# Altium PCB PCB3.PcbDoc
Units mm, origin at the board's own origin, x right, y up, seen from the top; angles counter-clockwise.
Board outline 99.9 x 60 mm, 2 copper layers (Top Layer, Bottom Layer); 34 components, 27 nets, 193 pads, 27 vias.
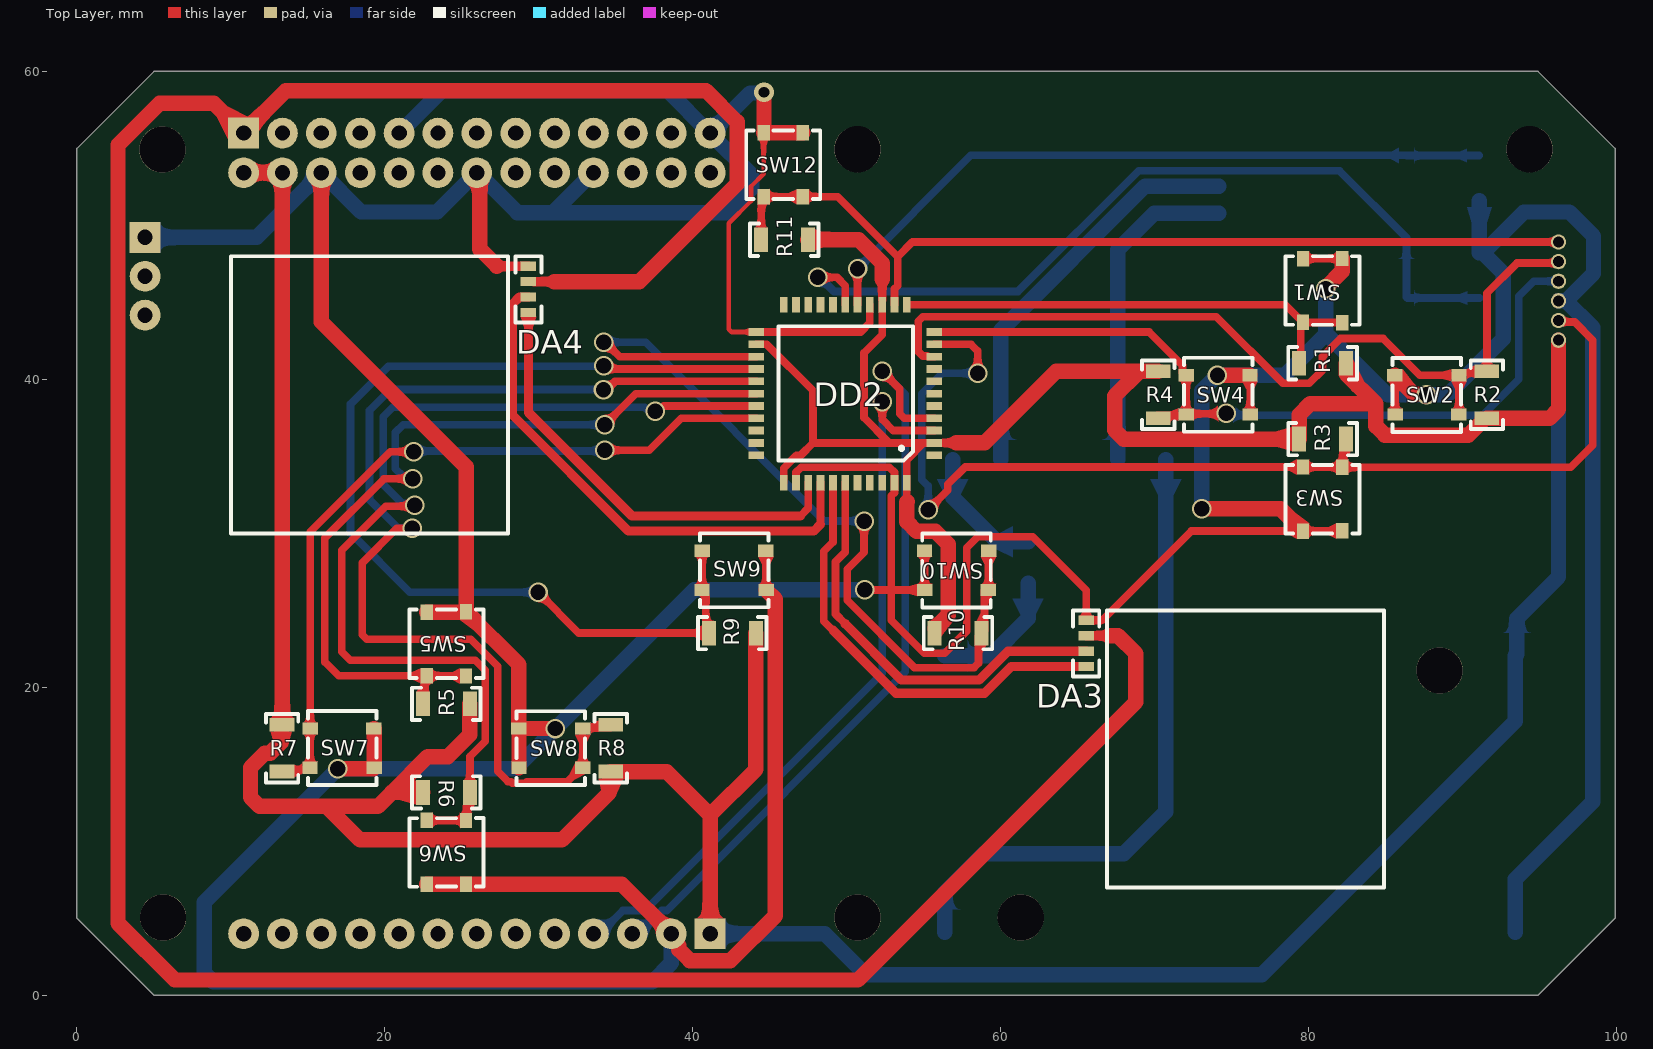
[diagram p0: Top Layer view]
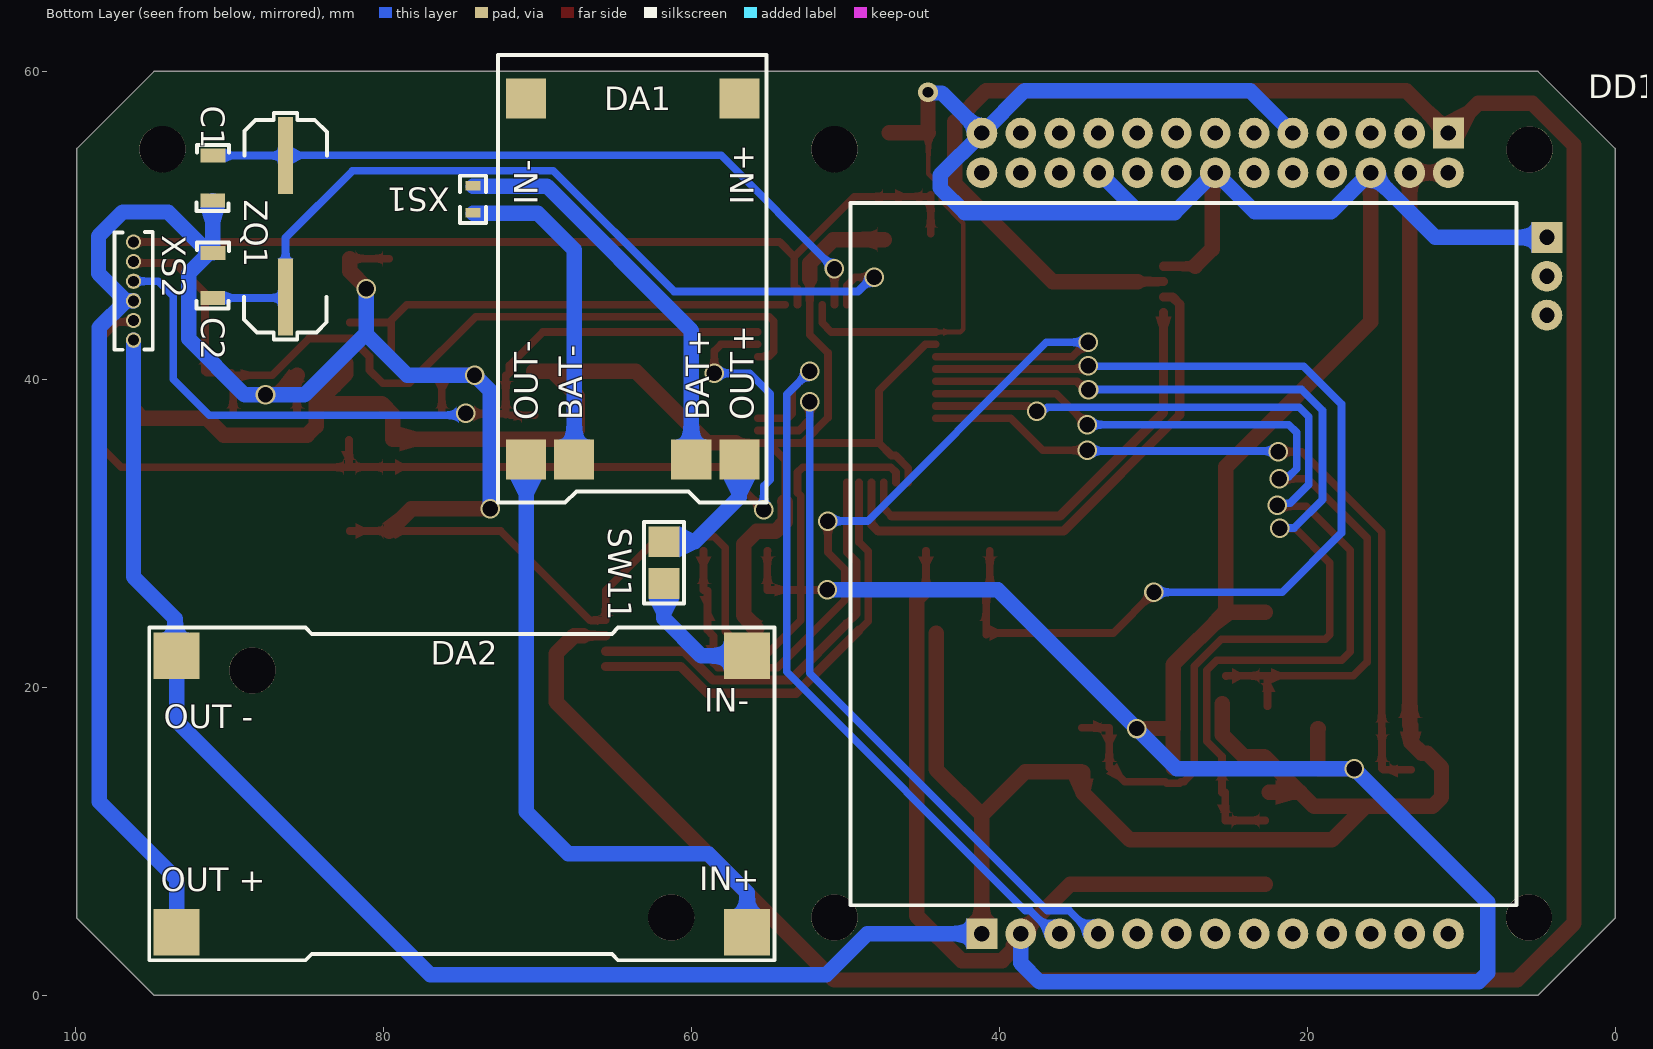
[diagram p1: Bottom Layer view, seen from below]
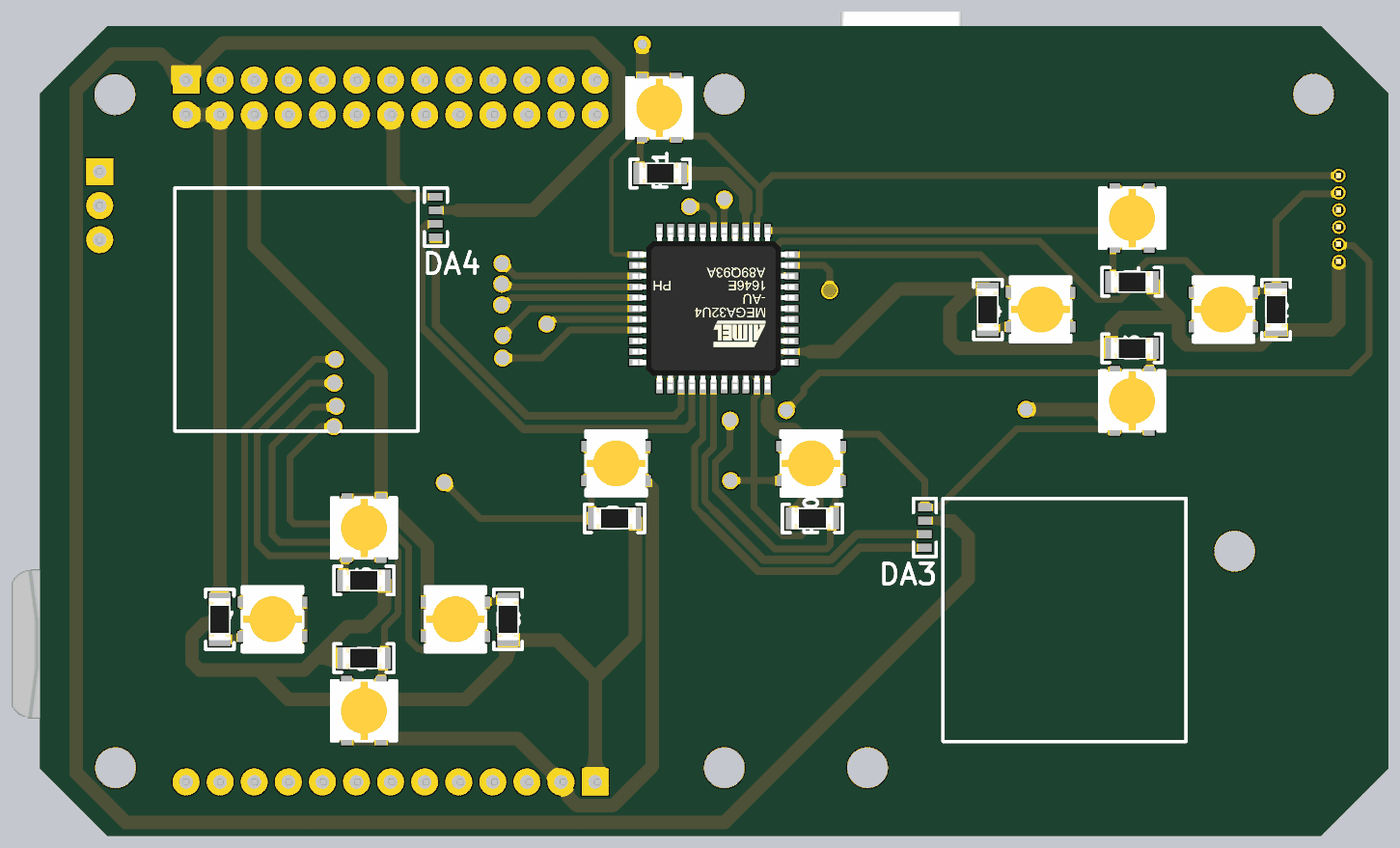
[diagram p2: 3D render of the assembled board from above, using the file's embedded part models]
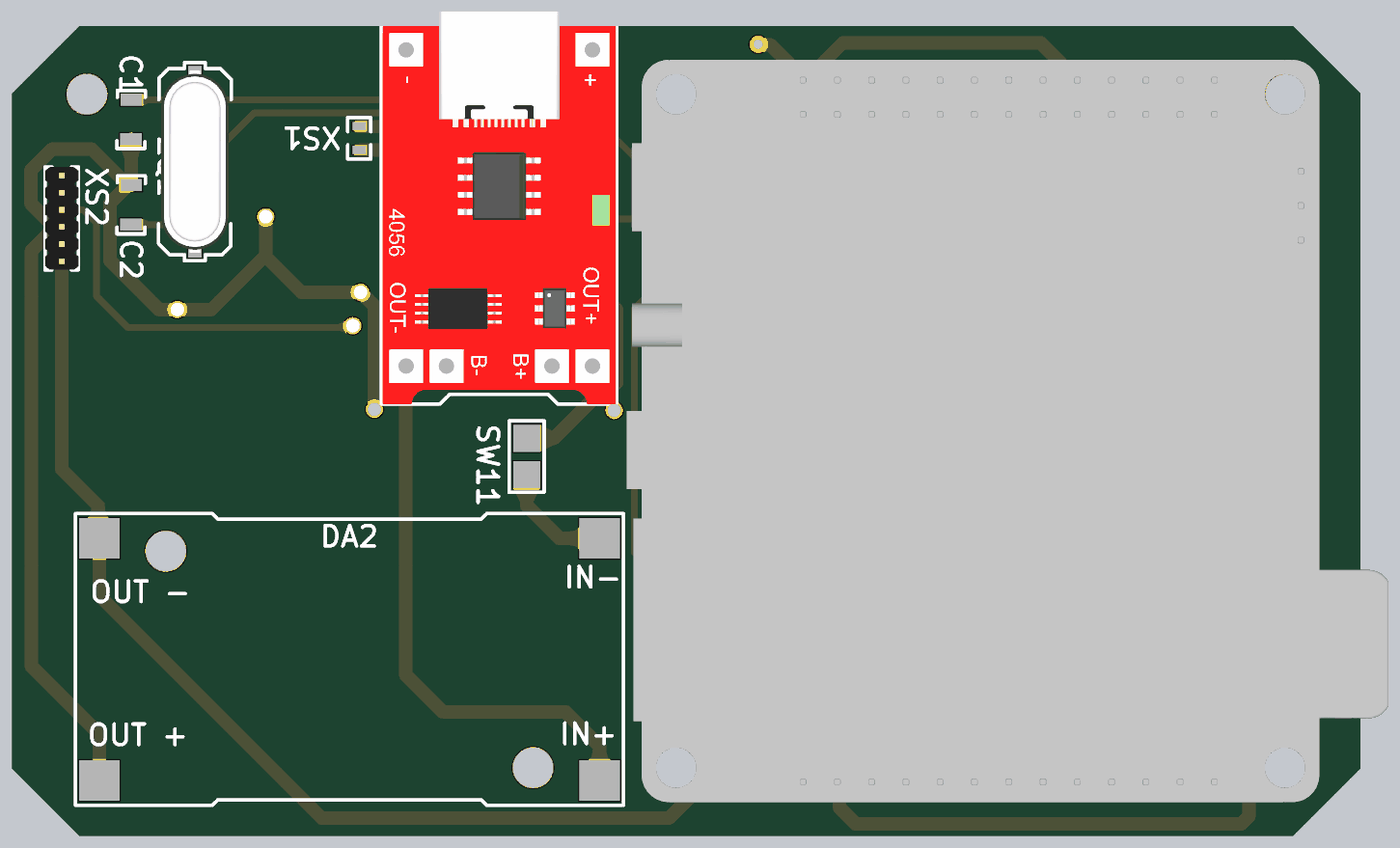
[diagram p3: 3D render of the assembled board from below, using the file's embedded part models]

## Layer stack, top to bottom
Top Solder: solder mask 0.0102, Solder Resist, Dk 3.5
Top Layer: signal copper 0.0356
Dielectric 1: dielectric 0.32, FR-4, Dk 4.8
Bottom Layer: signal copper 0.0356
Bottom Solder: solder mask 0.0102, Solder Resist, Dk 3.5

## Board outline
5,0 0,5 0,55 5,60 94.9,60 99.9,55 99.9,5 94.9,0

## Design rules (kind name [scope] priority, off if disabled: settings)
Clearance [All] p1: gap=0.254 ignorepadtopadclearanceinfootprint=FALSE
PolygonConnect [All] p1: connectstyle=Relief reliefconductorwidth=0.254 reliefentries=4 polygonreliefangle="90 Angle" airgapwidth=0.254
RoutingVias [All] p1: holewidth=0.711 width=1.27 viastyle="Through Hole" minholewidth=0.711 minwidth=1.27 maxholewidth=0.711 maxwidth=1.27
SolderMaskExpansion [All] p1: expansion=0.102 istentingtop=FALSE
SupplyNets "Schematic Supply Nets_2" [InNet('+3.3V')] p1: voltage=0.000
SupplyNets "Schematic Supply Nets_1" [InNet('GND')] p2: voltage=0.000
SupplyNets "Schematic Supply Nets" [InNet('+5V')] p3: voltage=0.000
Width [All] p1: maxlimit=1 minlimit=0.3 preferedwidth=0.5 minimp=50.000000 maximp=50.000000 favimp=50.000000
30 further rules are at their usual default settings.

## Components (designator, comment, footprint, x,y, rotation, side; value= is the part's Value field where it differs from the comment)
C1 "capasitor" "capacitor 1206" 91.075,53.075 r90 bottom
C2 "capasitor" "capacitor 1206" 91.075,46.75 r270 bottom
DA1 "1S 4056 BMS USB C" "1S 4056 BMS USB C" 63.7,46.1 r90 bottom locked
DA2 "DC-DC" DC-DC 74.9,13.075 r180 bottom locked
DA3 "joy stick 4 pin" "joy stick psp 4 pin" 65.55,22.85 r90 top
DA4 "joy stick 4 pin" "joy stick psp 4 pin" 29.325,45.85 r90 top
DD1 "orange PI ZERO 3" "orange Pi Zero 3" 28.15,30 r270 bottom locked
DD2 "ATmega32U4" atmega32u4 49.9,39.075 r180 top
R1 "resistor" "resistor 1206" 80.9,41.05 r0 top
R2 "resistor" "resistor 1206" 91.575,39 r270 top
R3 "resistor" "resistor 1206" 80.9,36.125 r180 top
R4 "resistor" "resistor 1206" 70.225,39 r90 top
R5 "resistor" "resistor 1206" 24,18.925 r0 top
R6 "resistor" "resistor 1206" 24,13.175 r180 top
R7 "resistor" "resistor 1206" 13.325,16.05 r90 top
R8 "resistor" "resistor 1206" 34.675,16.05 r270 top
R9 "resistor" "resistor 1206" 42.575,23.525 r0 top
R10 "resistor" "resistor 1206" 57.225,23.525 r180 top
R11 "resistor" "resistor 1206" 45.95,49.075 r0 top
SW1 "button" "membrane button" 80.9,45.775 r270 top
SW2 "button" "membrane button" 87.675,39 r0 top
SW3 "button" "membrane button" 80.9,32.225 r90 top
SW4 "button" "membrane button" 74.125,39 r180 top
SW5 "button" "membrane button" 24,22.825 r270 top
SW6 "button" "membrane button" 24,9.275 r90 top
SW7 "button" "membrane button" 17.225,16.05 r180 top
SW8 "button" "membrane button" 30.775,16.05 r0 top
SW9 "button" "membrane button" 42.685,27.601 r180 top
SW10 "button" "membrane button" 57.125,27.6 r0 top
SW11 "button" PowerButton 61.775,29.45 r270 bottom
SW12 "button" "membrane button" 45.875,53.95 r270 top
XS1 "power" power 74.2,51.675 r270 bottom
XS2 "IRF7389" JOIN_6 96.2,45.75 r90 bottom
ZQ1 "quartz resonator" "quartz resonator" 86.35,49.95 r90 bottom

## Footprints (in the part's own frame and the unit in brackets; to place one, negate y for a bottom-side part, rotate by r counter-clockwise, add the part's x,y. Pads: shape width x height; smd on the part's side, far side on the other; paste and mask are expansions set on the pad)
"1S 4056 BMS USB C" [mm]
  rect 2.6x2.6 smd: 1(12.15,7.025) 2(12.15,-6.825) 3(-11.3,-3.7) 4(-11.3,3.9) 5(-11.3,7.025) 6(-11.3,-6.825)
  silkscreen extent -14.1,-8.6 14.97,8.85, body extent -14.11,-8.55 14.97,8.75, height 5.26
atmega32u4 [mm]
  rect 1x0.5 smd: 1(-5.775,4) 2(-5.775,3.2) 3(-5.775,2.4) 4(-5.775,1.6) 5(-5.775,0.8) 6(-5.775,0) 7(-5.775,-0.8) 8(-5.775,-1.6) 9(-5.775,-2.4) 10(-5.775,-3.2) 11(-5.775,-4) 23(5.775,-4) 24(5.775,-3.2) 25(5.775,-2.4) 26(5.775,-1.6) 27(5.775,-0.8) 28(5.775,0) 29(5.775,0.8) 30(5.775,1.6) 31(5.775,2.4) 32(5.775,3.2) 33(5.775,4)
  rect 0.5x1 smd: 12(-4,-5.775) 13(-3.2,-5.775) 14(-2.4,-5.775) 15(-1.6,-5.775) 16(-0.8,-5.775) 17(0,-5.775) 18(0.8,-5.775) 19(1.6,-5.775) 20(2.4,-5.775) 21(3.2,-5.775) 22(4,-5.775) 34(4,5.775) 35(3.2,5.775) 36(2.4,5.775) 37(1.6,5.775) 38(0.8,5.775) 39(0,5.775) 40(-0.8,5.775) 41(-1.6,5.775) 42(-2.4,5.775) 43(-3.2,5.775) 44(-4,5.775)
  silkscreen extent -4.4,-4.38 4.33,4.35, body extent -6,-6 6,6, height 1.05
"capacitor 1206" [mm]
  rect 0.9x1.6 smd: 1(-1.462,0.013) 2(1.463,-0.012)
  silkscreen extent -2.15,-1.05 2.15,1.05, body extent -1.56,-0.74 1.54,0.76, height 1.61
DC-DC [mm]
  rect 3x3 smd: 1(18.525,8.975) 2(18.525,-8.975) 3(-18.525,-8.975) 4(-18.525,8.975)
  round 3 hole 3: ""(-13.6,8.025) ""(13.6,-8.025)
  silkscreen extent -20.3,-10.8 20.3,10.8, body extent -20.1,-10.55 20.1,10.55, height 12.25
JOIN_6 [mm]
  round 1 hole 0.7: 1(-3.2,0.025) 2(-1.925,0.025) 3(-0.65,0.025) 4(0.625,0.025) 5(1.9,0.025) 6(3.175,0.025)
  silkscreen extent -3.83,-1.22 3.81,1.25, body extent -3.81,-1.25 3.81,1.25, height 4.61
"joy stick psp 4 pin" [mm]
  rect 0.6x1 smd: 1(-1.5,0) 2(-0.5,0) 3(0.5,0) 4(1.5,0)
  silkscreen extent -2.15,-0.85 2.15,0.85
"membrane button" [mm]
  rect 1x0.8 smd: 1(-2.075,1.275) 1(-2.065,-1.274) 2(2.075,-1.275) 2(2.085,1.276)
  silkscreen extent -2.22,-2.41 2.23,2.4, body extent -2.22,-2.39 2.22,2.39, height 0.84
"orange Pi Zero 3" [mm]
  rect 2x2 hole 1: 1(-26,17.325) 27(-19.225,23.725) 42(26,-12.975)
  round 2 hole 1: 2(-26,14.8) 3(-26,12.275) 4(-26,9.75) 5(-26,7.225) 6(-26,4.7) 7(-26,2.175) 8(-26,-0.35) 9(-26,-2.875) 10(-26,-5.4) 11(-26,-7.925) 12(-26,-10.45) 13(-26,-12.975) 14(-23.425,17.325) 15(-23.425,14.8) 16(-23.425,12.275) 17(-23.425,9.75) 18(-23.425,7.225) 19(-23.425,4.7) 20(-23.425,2.175) 21(-23.425,-0.35) 22(-23.425,-2.875) 23(-23.425,-5.4) 24(-23.425,-7.925) 25(-23.425,-10.45) 26(-23.425,-12.975) 28(-16.7,23.725) 29(-14.175,23.725) 30(26,17.325) 31(26,14.8) 32(26,12.275) 33(26,9.75) 34(26,7.225) 35(26,4.7) 36(26,2.175) 37(26,-0.35) 38(26,-2.875) 39(26,-5.4) 40(26,-7.925) 41(26,-10.45)
  silkscreen extent -21.45,-21.5 24.15,21.75, body extent -27.5,-26.2 27.5,30.23, height 17.7
power [mm]
  rect 0.6x1 smd: 1(-0.9,0.025) 2(0.85,0.025)
  silkscreen extent -1.55,-0.82 1.53,0.88
PowerButton [mm]
  rect 2x2 smd: 1(0,0) 2(2.7,0)
  silkscreen extent -1.3,-1.3 4,1.3
"quartz resonator" [mm]
  rect 5x1 smd: 1(-4.6,0) 2(4.6,0)
  silkscreen extent -7.35,-2.69 7.35,2.69, body extent -6.75,-2.5 6.75,2.5, height 4.3
"resistor 1206" [mm]
  rect 0.9x1.6 smd: 1(-1.525,0) 2(1.525,0)
  silkscreen extent -2.22,-1.05 2.23,1.05, body extent -1.55,-0.8 1.55,0.8, height 0.56

## Part data
XS2: library part "Join 6 pin"

## Free pads (board coordinates)
  round 3 hole 3: ""(5.55,54.925) ""(5.6,5.05) ""(50.7,5.05) ""(50.7,54.95) ""(94.35,54.95)

## Via types
v1: diameter 1.27, hole 1, Top Layer to Bottom Layer, 26 vias
v2: diameter 1.27, hole 0.711, Top Layer to Bottom Layer, 1 vias

## Nets (pads, with @x,y where several pads share a name; then routed paths per layer and width w, separated by ;. In a path a pad name is that pad's centre, name@x,y a point inside that pad or via, vN(x,y) a via of type N, cw(c..) or ccw(c..) an arc to the next point about the centre after c; other vN are vias at no path point)
+3.3V: DA3.3 DA4.3 DD1.1 | length 196.8
  Top Layer w0.6: DA4.3 31,46.35 ; DA3.3 67,23.35
  Top Layer w1: 31,46.35 36.531,46.35 42.879,52.698 42.879,56.727 40.856,58.75 13.575,58.75 DD1.1 8.9,57.925 5.362,57.925 2.671,55.234 2.671,4.679 6.358,0.992 50.717,0.992 68.775,19.05 68.775,22.189 67.614,23.35 67,23.35
+5V: DA2.4 DD1.14 DD1.15 DD1.42 DD2.2 DD2.14 DD2.24 DD2.34 DD2.44 R1.2 R2.2 R3.2 R4.2 R5.2 R6.2 R7.2 R8.2 R9.2 R10.2 R11.2 XS2.1 | length 316
  Top Layer w0.5: DD2.24 44.788,42.275 47.812,39.25 47.812,35.875 ; DD2.34 45.9,34.229 46.729,35.058 46.995,35.058 47.812,35.875 ; 52.3,46.5 DD2.14 52.3,42.9 51.125,41.725 51.125,37.509 52.713,35.921 ; 53.941,32.059 53.9,32.1 DD2.44 53.9,34.763 55.012,35.875 ; 57.1,35.875 DD2.2 55.012,35.875 ; 47.812,35.875 52.713,35.875 55.012,35.875
  Top Layer w1: DD1.14 DD1.15 13.337,53.412 13.337,17.588 R7.2 ; R7.2@13.275,17.525 13.275,16.447 12.557,15.729 12.213,15.729 11.275,14.791 11.275,12.861 11.861,12.275 16.225,12.275 ; R6.2 20.45,13.175 ; R5.2 25.525,16.925 24.1,15.5 22.775,15.5 20.45,13.175 ; DD1.42 41.125,11.7 ; R9.2 44.1,14.675 41.125,11.7 ; R11.2 50.775,49.075 52.3,47.55 52.3,46.5 ; 53.941,32.059 53.9,32.017 53.9,30.76 54.531,30.129 55.762,30.129 56.6,29.291 56.6,24.675 R10.2@55.75,23.825 ; 57.1,35.875 58.95,35.875 63.6,40.525 69,40.525 ; R4.2 69,40.525 ; R1.2 82.425,40.35 84.356,38.419 ; XS2.1 96.225,38.061 95.639,37.475 R2.2 91.525,37.425 91.275,37.425 91.275,37.284 90.366,36.375 84.942,36.375 84.356,36.961 84.356,38.419 ; 16.225,12.275 19.55,12.275 20.45,13.175 ; 16.225,12.275 18.4,10.1 24.559,10.1 24.563,10.096 25.987,10.096 25.991,10.1 31.5,10.1 34.579,13.179 34.579,14.475 34.625,14.475 R8.2 38.3,14.525 41.125,11.7 ; 69,40.525 67.4,38.925 67.4,36.711 67.986,36.125 R3.2 79.375,37.7 80.094,38.419 84.356,38.419
  Bottom Layer w1: DD1.42 48.562,4 51.237,1.325 76.95,1.325 93.425,17.8 DA2.4 93.514,22.139 93.514,24.464 96.225,27.175 XS2.1
GND: C1.1 C2.1 DA2.3 DA3.4 DA4.4 DD1.5 DD1.13 DD1.16 DD1.20 DD1.23 DD1.27 DD1.41 DD2.15 DD2.23 DD2.35 DD2.43 SW1.1 SW2.1 SW3.1 SW4.1 SW5.1 SW6.1 SW7.1 SW8.1 SW9.1 SW10.1 SW12.1 XS2.3 | length 501.7
  Top Layer w0.3: DD2.23 42.52,43.075 42.344,43.251 42.344,50.145 43.783,51.583 43.783,52.529 44.601,53.347 SW12.1@44.601,56.015
  Top Layer w0.5: DD2.23 50.9,43.075 51.5,43.675 DD2.15 ; SW9.1@44.75,28.875 44.755,28.87 44.755,26.331 SW9.1@44.76,26.326 ; DD2.35 46.7,33.963 47.041,34.304 52.759,34.304 53.1,33.963 DD2.43 53.1,32.637 52.896,32.433 52.896,26.326 ; v1(51.161,26.326) 52.896,26.326 ; SW10.1@55.05,28.875 55.055,28.87 55.055,26.331 55.06,26.326 52.896,26.326 ; SW4.1@76.19,40.274 76.195,40.269 76.195,37.73 SW4.1@76.2,37.725 ; SW1.1@79.626,47.84 79.631,47.845 82.17,47.845 SW1.1@82.175,47.85 ; SW3.1@82.174,30.16 82.169,30.155 79.63,30.155 79.625,30.15 72.38,30.15 66.58,24.35 DA3.4 65.55,26.306 62.077,29.78 58.502,29.78 57.796,29.074 57.796,23.658 56.359,22.221 55.041,22.221 52.896,24.366 52.896,26.326 ; SW2.1@85.605,40.27 85.605,37.731 SW2.1@85.61,37.726
  Top Layer w0.6: 27.275,47.35 DA4.4
  Top Layer w1: DD1.16 15.875,43.727 25.275,34.327 SW5.1@25.275,24.9 ; v1(16.95,14.725) 19.25,14.725 19.3,14.775 19.3,17.314 SW7.1@19.29,17.324 ; SW6.1@22.725,7.2 22.735,7.21 25.274,7.21 35.39,7.21 DD1.41 38.791,3.809 38.791,3.538 39.097,3.232 39.097,2.962 39.813,2.246 42.437,2.246 45.354,5.163 45.354,25.732 SW9.1@44.76,26.326 ; SW5.1@22.726,24.89 25.265,24.89 SW5.1@25.275,24.9 ; DD1.20 26.166,53.234 26.166,48.459 27.275,47.35 ; SW8.1@28.71,14.776 28.71,17.315 SW8.1@28.7,17.325 ; v1(31.075,17.325) SW8.1@28.7,17.325 ; SW12.1@44.601,56.015 SW12.1@44.611,56.025 ; v2(44.625,58.65) 44.625,56.039 SW12.1@44.611,56.025 ; SW12.1@47.15,56.025 SW12.1@44.611,56.025 ; v1(73.05,31.6) 78.175,31.6 SW3.1@79.625,30.15 ; v1@74.076,40.274 SW4.1@76.19,40.274 ; v1(81.1,45.875) 81.1,45.948 82.175,47.023 SW1.1@82.175,47.85 ; SW2.1@85.6,40.275 85.605,40.27 86.823,39.052 87.598,39.052 v1(87.65,39) ; SW5.1@25.275,24.9 28.7,21.475 SW8.1@28.7,17.325
  Bottom Layer w1: DD1.27 11.675,49.225 DD1.16 15.903,53.425 18.453,50.875 23.397,50.875 25.947,53.425 DD1.20 26.003,53.425 28.603,50.825 30.922,50.825 ; DD1.5 20.953,56 23.703,58.75 38.347,58.75 41.097,56 DD1.13 ; DD1.23 33.522,53.425 30.922,50.825 ; DD1.41 38.6,2.1 37.375,0.875 8.861,0.875 8.275,1.461 8.275,6.05 v1(16.95,14.725) 28.475,14.725 v1(31.075,17.325) 40.076,26.326 v1(51.161,26.326) ; v2(44.625,58.65) 44.573,58.598 43.723,58.598 DD1.13 ; v1(73.05,31.6) 73.05,39.25 v1(74.075,40.275) 78.45,40.275 81.1,42.925 ; v1(81.1,45.875) 81.1,43.025 85.125,39 v1(87.65,39) 89,39 92.642,42.642 92.642,46.883 91.312,48.212 93.975,50.875 96.925,50.875 98.5,49.3 98.5,46.877 XS2.3@96.723,45.1 ; C2.1 91.075,48.225 91.075,51.6 C1.1 ; DA2.3 93.425,7.55 98.45,12.575 98.45,43.373 XS2.3@96.723,45.1 ; XS2.3 XS2.3@96.723,45.1 ; 30.922,50.825 42.225,50.825 43.835,52.435 43.835,53.263 41.125,55.972 DD1.13
NetC1_2: C1.2 DD2.16 ZQ1.2 | length 45.8
  Top Layer w0.5: DD2.16 v1(50.7,47.186)
  Bottom Layer w0.5: v1(50.7,47.186) 58.064,54.55 ZQ1.2 86.362,54.538 C1.2
NetC2_2: C2.2 DD2.17 ZQ1.1 | length 55.5
  Top Layer w0.5: v1(48.125,46.625) 49.364,46.625 49.9,46.089 DD2.17
  Bottom Layer w0.5: v1(48.125,46.625) 48.256,46.625 49.17,45.711 61.116,45.711 68.959,53.554 81.996,53.554 86.35,49.2 ZQ1.1 86.413,45.287 C2.2
NetDA1_3: DA1.3 XS1.1 | length 26.4
  Bottom Layer w1: DA1.3 60,43.175 69.375,52.55 XS1.1@74.175,52.55
NetDA1_4: DA1.4 XS1.2 | length 21.2
  Bottom Layer w1: DA1.4 67.6,48.425 69.975,50.8 XS1.2@74.175,50.8
NetDA1_5: DA1.5 DA2.2 | length 42
  Bottom Layer w1: DA2.2 56.375,6.675 58.9,9.2 68,9.2 70.725,11.925 DA1.5
NetDA1_6: DA1.6 SW11.1 | length 8.6
  Bottom Layer w1: DA1.6 56.875,32.35 59.775,29.45 SW11.1
NetDA2_1: DA2.1 SW11.2 | length 8.7
  Bottom Layer w1: DA2.1 59.35,22.05 61.775,24.475 SW11.2
NetDA3_1: DA3.1 DD2.38 | length 28.9
  Top Layer w0.5: 49.1,23.717 48.514,24.303 48.514,28.847 49.1,29.433 DD2.38
  Top Layer w0.6: 49.1,23.717 53.2,19.617 58.944,19.617 60.677,21.35 DA3.1
NetDA3_2: DA3.2 DD2.39 | length 27.6
  Top Layer w0.5: DD2.39 49.9,28.793 49.268,28.161 49.268,24.761 49.904,24.125
  Top Layer w0.6: 49.904,24.125 49.904,24.121 53.554,20.471 58.59,20.471 60.469,22.35 DA3.2
NetDA4_1: DA4.1 DD2.36 | length 29.3
  Top Layer w0.5: 46.975,31.125 47.5,31.65 DD2.36
  Top Layer w0.6: DA4.1 29.325,37.85 36.05,31.125 46.975,31.125
NetDA4_2: DA4.2 DD2.37 | length 34.5
  Top Layer w0.5: 48.296,30.592 48.3,30.596 DD2.37
  Top Layer w0.6: DA4.2 28.742,45.35 28.271,44.879 28.271,37.696 35.821,30.146 47.854,30.146 48.296,30.588 48.296,30.592
NetDD1_39: DD1.39 DD2.3 | length 48.2
  Top Layer w0.5: v1(52.3,38.55) 52.3,37.4 53.025,36.675 DD2.3
  Bottom Layer w0.5: DD1.39 33.948,4 35.452,5.504 36.879,5.504 52.3,20.925 v1(52.3,38.55)
NetDD1_40: DD1.40 DD2.4 | length 50.5
  Top Layer w0.5: v1(52.3,40.525) 53.45,39.375 53.45,37.768 53.743,37.475 DD2.4
  Bottom Layer w0.5: DD1.40 36.473,4 37.977,5.504 38.304,5.504 53.804,21.004 53.804,39.021 v1(52.3,40.525)
NetDD2_9: DD2.9 R2.1 SW2.2 XS2.5 | length 57.6
  Top Layer w0.5: DD2.9 55.279,41.475 55.233,41.521 54.943,41.521 54.65,41.814 54.65,43.782 54.943,44.075 74.002,44.075 78.331,39.746 80.034,39.746 80.9,40.612 80.9,41.488 82.062,42.65 84.838,42.65 87.212,40.276 89.76,40.276 89.755,40.27 89.755,37.73 SW2.2@89.75,37.725 ; SW2.2@89.888,40.425 R2.1@91.462,40.425 ; R2.1 91.575,45.6 93.529,47.554 96.129,47.554 XS2.5
NetDD2_10: DD2.10 R3.1 SW3.2 XS2.2 | length 72.6
  Top Layer w0.5: v1(55.289,31.525) 56.568,32.804 56.568,33.179 57.699,34.31 79.624,34.31 79.63,34.305 SW3.2@82.17,34.305 ; DD2.10 58.064,42.275 58.5,41.839 v1(58.5,40.4) ; SW3.2@82.175,34.3 97.025,34.3 98.45,35.725 98.45,42.55 97.271,43.729 96.321,43.729 XS2.2 ; SW3.2@82.225,34.488 R3.1@82.225,36.062
  Bottom Layer w0.5: v1(55.289,31.525) 55.289,33.073 54.875,33.487 54.875,39.075 56.2,40.4 v1(58.5,40.4)
NetDD2_11: DD2.11 R4.1 SW4.2 XS2.4 | length 53
  Top Layer w0.5: DD2.11 69.638,43.075 71.8,40.913 71.8,40.425 71.95,40.275 72.05,40.275 72.045,40.27 72.045,37.73 72.04,37.724 72.078,37.762 74.612,37.762 v1(74.65,37.8) ; R4.1@70.163,37.675 SW4.2@71.737,37.675
  Bottom Layer w0.5: v1(74.65,37.8) 74.775,37.675 91.3,37.675 93.646,40.021 93.646,45.396 94.625,46.375 XS2.4
NetDD2_12: DD2.12 R1.1 SW1.2 | length 31.4
  Top Layer w0.5: DD2.12 78.475,44.85 79.625,43.7 79.63,43.695 82.17,43.695 SW1.2@82.176,43.69 ; R1.1@79.475,41.05 SW1.2@79.475,43.7
NetDD2_13: DD2.13 R11.1 SW12.2 XS2.6 | length 59.4
  Top Layer w0.5: R11.1@44.45,49.455 SW12.2@44.45,51.995 ; SW12.2@44.6,51.875 44.605,51.87 47.145,51.87 47.151,51.865 49.405,51.865 53.304,47.966 ; DD2.13 53.1,45.88 53.304,46.084 53.304,47.966 ; XS2.6 54.263,48.925 53.304,47.966
NetDD2_25: DD2.25 R10.1 SW10.2 | length 55.2
  Top Layer w0.5: v1(34.225,42.412) 34.31,42.412 35.247,41.475 DD2.25 ; v1(51.125,30.8) 51.125,28.774 50.022,27.671 50.022,25.653 54.4,21.275 58.257,21.275 58.55,21.568 58.55,23.325 R10.1 ; R10.1@58.95,23.73 SW10.2@58.95,26.27 ; SW10.2@59.2,26.325 59.205,26.33 59.205,28.87 SW10.2@59.21,28.876
  Bottom Layer w0.5: v1(34.225,42.412) 36.938,42.412 48.55,30.8 v1(51.125,30.8)
NetDD2_26: DD2.26 R9.1 SW9.2 | length 66.7
  Top Layer w0.5: v1(29.95,26.175) 32.6,23.525 R9.1@40.85,23.525 ; v1(34.215,40.888) 34.424,40.888 34.637,40.675 DD2.26 ; SW9.2@40.6,26.325 40.605,26.33 40.605,28.87 SW9.2@40.61,28.876 ; R9.1@40.85,23.43 SW9.2@40.85,25.97
  Bottom Layer w0.5: v1(29.95,26.175) 21.625,26.175 17.775,30.025 17.775,38.4 20.238,40.863 34.19,40.863 v1(34.215,40.888)
NetDD2_27: DD2.27 R8.1 SW8.2 | length 71.1
  Top Layer w0.5: v1(21.775,30.323) 20.773,30.323 18.525,28.075 18.525,23.418 18.818,23.125 25.569,23.125 27.325,21.369 27.325,14.548 28.002,13.872 28.194,13.872 28.294,13.772 29.126,13.772 29.226,13.872 31.847,13.872 32.75,14.775 32.85,14.775 32.855,14.78 32.855,17.32 SW8.2@32.86,17.326 ; SW8.2@32.86,17.375 R8.1@34.645,17.375 ; v1(34.2,39.339) 34.408,39.339 34.944,39.875 DD2.27
  Bottom Layer w0.5: v1(21.775,30.323) 21.744,30.353 20.847,30.353 19,32.2 19,37.975 20.364,39.339 v1(34.2,39.339)
NetDD2_28: DD2.28 R5.1 SW5.2 | length 55.1
  Top Layer w0.5: v1(21.8,33.55) 19.95,33.55 16.1,29.7 16.1,21.65 17,20.75 SW5.2@22.575,20.75 ; R5.1@22.575,18.78 SW5.2@22.575,20.75 ; SW5.2@25.276,20.74 25.27,20.745 22.73,20.745 22.725,20.75 SW5.2@22.575,20.75 ; v1(34.284,37.061) 36.298,39.075 DD2.28
  Bottom Layer w0.5: v1(21.8,33.55) 21.653,33.697 21.178,33.697 20.675,34.2 20.675,36.55 21.186,37.061 v1(34.284,37.061)
NetDD2_29: DD2.29 R6.1 SW6.2 | length 66.9
  Top Layer w0.5: v1(21.948,31.837) 21.873,31.763 20.063,31.763 17.2,28.9 17.2,22.304 17.75,21.754 25.874,21.754 26.529,21.099 26.529,16.509 25.525,15.505 R6.1 ; SW6.2@22.724,11.36 22.73,11.355 25.27,11.355 SW6.2@25.275,11.35 ; SW6.2@25.325,11.35 R6.1@25.325,13.175 ; v1(37.55,37.925) 37.758,37.925 38.108,38.275 DD2.29
  Bottom Layer w0.5: v1(21.948,31.837) 21.823,31.961 21.114,31.961 19.9,33.175 19.9,37.575 20.525,38.2 36.872,38.2 37,38.072 37.403,38.072 v1(37.55,37.925)
NetDD2_30: DD2.30 R7.1 SW7.2 | length 49.3
  Top Layer w0.5: R7.1@13.23,14.65 15.064,14.65 SW7.2@15.14,14.725 ; SW7.2@15.14,14.774 15.145,14.78 15.145,17.32 15.15,17.325 15.15,30.1 20.35,35.3 v1(21.875,35.3) ; v1(34.275,35.4) 37.175,35.4 39.25,37.475 DD2.30
  Bottom Layer w0.5: v1(21.875,35.3) 21.925,35.35 34.225,35.35 v1(34.275,35.4)
pads on no net: DA1.1 DA1.2 DA2. DD1.2 DD1.3 DD1.4 DD1.6 DD1.7 DD1.8 DD1.9 DD1.10 DD1.11 DD1.12 DD1.17 DD1.18 DD1.19 DD1.21 DD1.22 DD1.24 DD1.25 DD1.26 DD1.28 DD1.29 DD1.30 DD1.31 DD1.32 DD1.33 DD1.34 DD1.35 DD1.36 DD1.37 DD1.38 DD2.1 DD2.5 DD2.6 DD2.7 DD2.8 DD2.18 DD2.19 DD2.20 DD2.21 DD2.22 DD2.31 DD2.32 DD2.33 DD2.40 DD2.41 DD2.42

## Silkscreen, mask and mechanical layers (free items; w line width, h text height)
Top Overlay:
  lines w0.254: 20,30 10,30 ; 10,30 10,48 28,48 28,30 10,30 ; 66.9,7 66.9,25 84.9,25 84.9,7 66.9,7
Mechanical 1:
  lines w0.254: 0,5 0,55 ; 0,5 0,5 ; 0,5 5,0 85,0 94.9,0 99.9,5 99.9,55 94.9,60 85,60 5,60 ; 0,55 5,60 ; 0,55 5,60

## Text inside footprints (layer, text, board x,y; h text height)
DA1: Bottom Overlay "IN-" at 69.954,51.354 h1.52 r270; Bottom Overlay "IN+" at 55.954,51.354 h1.52 r270; Bottom Overlay "BAT+" at 58.829,37.354 h1.52 r270; Bottom Overlay "BAT-" at 67.079,37.354 h1.52 r270; Bottom Overlay "OUT-" at 69.954,37.354 h1.52 r270; Bottom Overlay "OUT+" at 55.954,37.354 h1.52 r270
DA2: Bottom Overlay "OUT -" at 94.271,17.354 h1.52; Bottom Overlay "OUT +" at 94.446,6.754 h1.52; Bottom Overlay "IN+" at 59.471,6.829 h1.52; Bottom Overlay "IN-" at 59.146,18.429 h1.52